# Altium PCB ExtendBoard.PcbDoc
Units mil, origin at the board's own origin, x right, y up, seen from the top; angles counter-clockwise.
Board outline 1157 x 1033 mil, 2 copper layers (Top1, Bottom4), stack 42.17 mil thick; 6 components, 10 nets, 32 pads, 2 vias.
Unrouted connection lines stored in the file: 56.
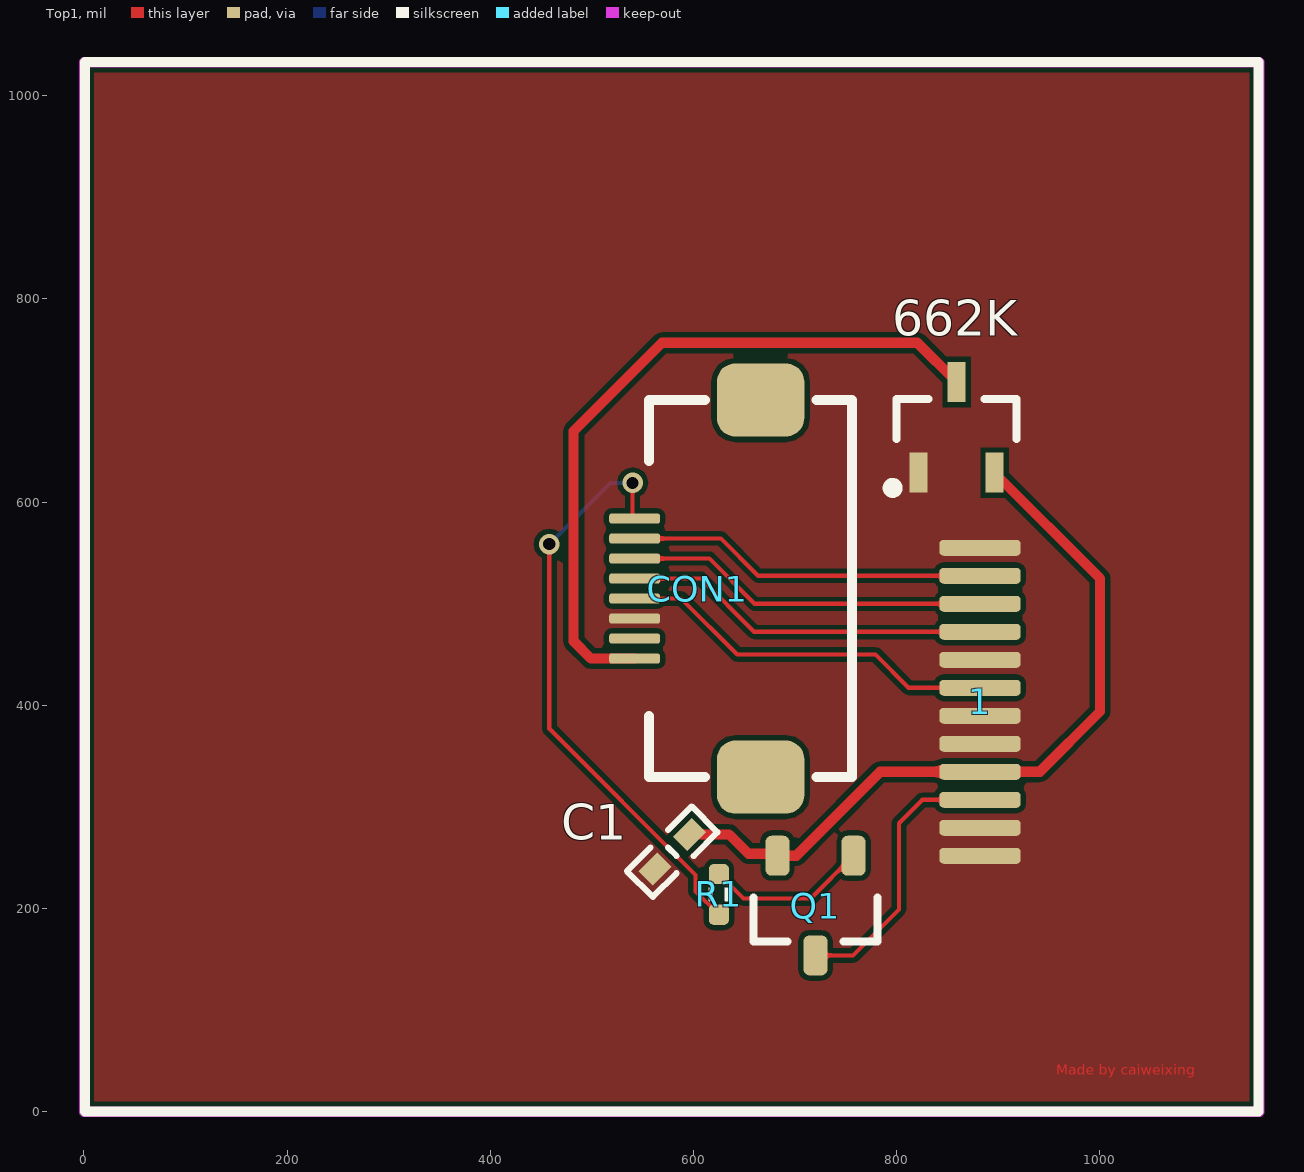
[diagram p0: Top1 view]
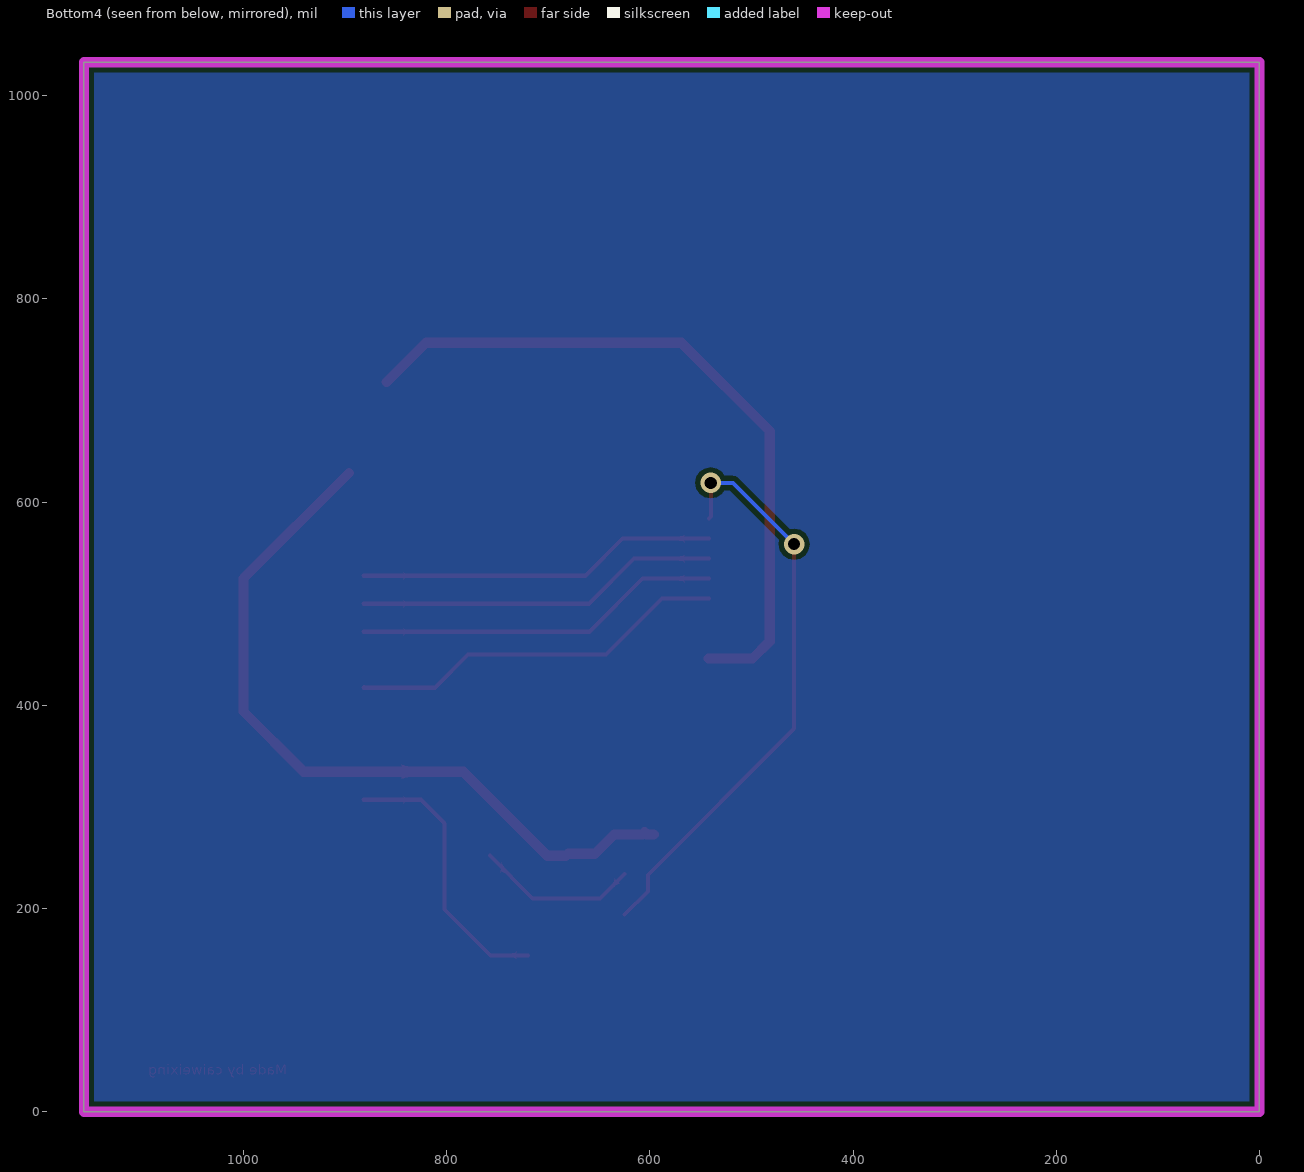
[diagram p1: Bottom4 view, seen from below]
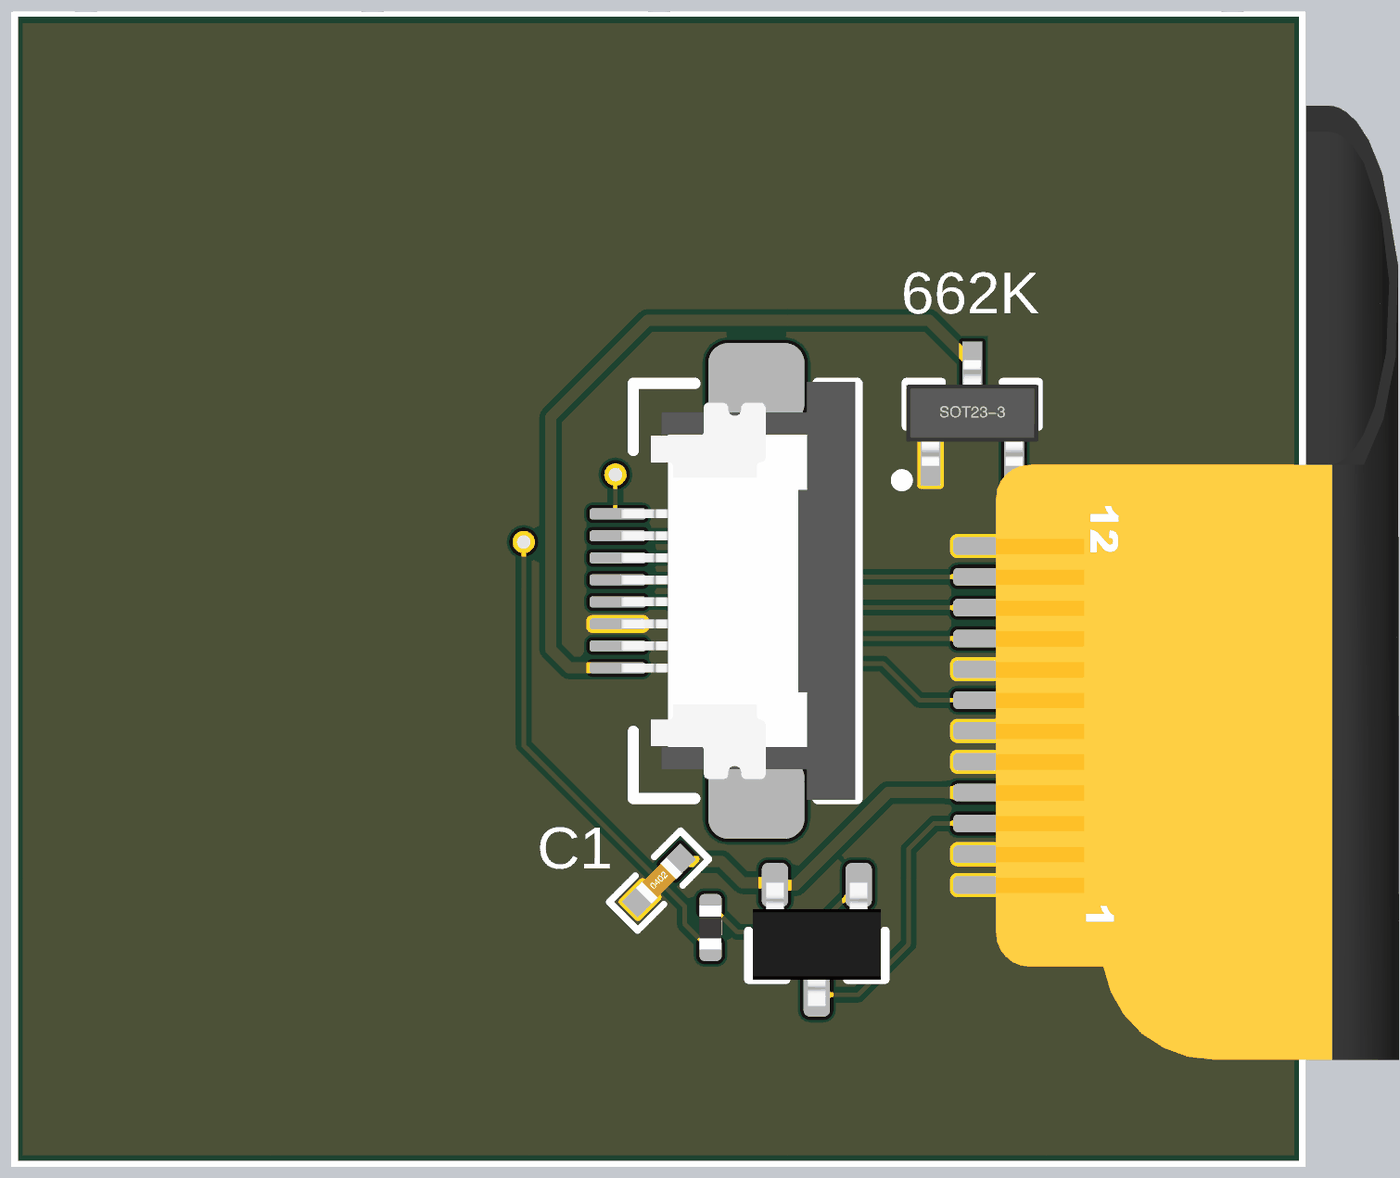
[diagram p2: 3D render of the assembled board from above, using the file's embedded part models]

## Layer stack, top to bottom
Top Solder: solder mask 0.4, Solder Resist, Dk 3.5
Top1: signal copper 1.4
Dielectric 2: core 39.37, PP-006, Dk 4.2
Bottom4: signal copper 1.4
Bottom Solder: solder mask 0.4, Solder Resist, Dk 3.5

## Board outline
0,0 1157,0 1157,1033 0,1033

## Design rules (kind name [scope] priority, off if disabled: settings)
Clearance [All] p1: gap=5 ignorepadtopadclearanceinfootprint=FALSE
ComponentClearance [All] p1: gap=0 collisioncheckmode=3 verticalgap=0 showdistances=FALSE
DiffPairsRouting [All] p1: maxlimit=9 minlimit=9 mostfreqgap=9 toplayer_minwidth=4 toplayer_maxwidth=4 toplayer_prefwidth=4 bottomlayer_minwidth=4 bottomlayer_maxwidth=4 bottomlayer_prefwidth=4 maxuncoupledlength=500
FanoutControl Fanout_BGA [All] p1: bgadir=Out bgaviamode=Centered fanoutstyle=Auto fanoutdirection=Alternating viagrid=1 // Fanout_BGA (Default Rule)
HoleSize [All] p1: absolutevalues=TRUE maxlimit=10000 minlimit=8 maxpercent=80.000 minpercent=20.000
MinimumSolderMaskSliver [All] p1 off: minsoldermaskwidth=2
PlaneClearance [All] p1: clearance=8
PlaneConnect [All] p1: planeconnectstyle=Direct reliefexpansion=20 reliefentries=4 reliefconductorwidth=10 reliefairgap=10
PolygonConnect [All] p1: connectstyle=Direct reliefconductorwidth=10 reliefentries=4 polygonreliefangle="90 Angle" airgapwidth=10
RoutingVias [All] p1: holewidth=8 width=16 viastyle="Through Hole" minholewidth=6 minwidth=12 maxholewidth=28 maxwidth=50
SilkToBoardRegionClearance [All] p1 off:
SilkToSilkClearance [All] p1: silktosilkclearance=0
SilkToSolderMaskClearance [IsPad] p1: minsilkscreentomaskgap=0 clearancetoexposedcopper=TRUE
SolderMaskExpansion [All] p1: expansion=3 istentingtop=FALSE
Width [All] p1: maxlimit=10000 minlimit=4 preferedwidth=4
20 further rules are at their usual default settings.

## Components (designator, comment, footprint, x,y, rotation, side; value= is the part's Value field where it differs from the comment)
1 "LCD-240x240" LCD-240X240-NOHOLE 675,534 r270 bottom locked
662K "XC6206P332MR" SOT23-3L 859,674 r0 top (schematic designator V1)
C1 "104" "C 0402_M" 579,256 r45 top
CON1 "FFC_0.5_8" FFC_0.5_8 631,515 r90 top
Q1 "AO3415A" SOT23-3 720,203 r270 top
R1 "1K" RES_0402 625,214 r90 top value=22R

## Footprints (in the part's own frame and the unit in brackets; to place one, negate y for a bottom-side part, rotate by r counter-clockwise, add the part's x,y. Pads: shape width x height; smd on the part's side, far side on the other; paste and mask are expansions set on the pad)
"C 0402_M" [mil] "无极性贴片电容"
  rect 26x20 smd: 1(-24,0) 2(24,0)
  silkscreen extent -45,-18 45,18, body extent -20,-10 20,10, height 21
FFC_0.5_8 [mil]
  rrect50% 72x86 smd: 0(-185.63,-35) 0(185.63,-35)
  rrect50% 10x50 smd: 1(-68.9,89) 2(-49.21,89) 3(-29.53,89) 4(-9.84,89) 5(9.84,89) 6(29.53,89) 7(49.21,89) 8(68.9,89)
  silkscreen extent -186,-125 186,75, body extent -187,-124 187,87, height 82
LCD-240X240-NOHOLE [mil]
  rrect50% 15.75x80 smd far side: 1(282,-207) 2(254.44,-207) 3(226.88,-207) 4(199.32,-207) 5(171.76,-207) 6(144.2,-207) 7(116.65,-207) 8(89.09,-207) 9(61.53,-207) 10(33.97,-207) 11(6.41,-207) 12(-21.15,-207)
  body extent -499,-565 534,673, height 20
RES_0402 [mil]
  rrect50% 20x20 smd: 1(-20,0) 2(20,0)
  silkscreen extent -7,-10 7,10, body extent -20,-10 20,10, height 14
SOT23-3 [mm] "SOT23, 3-Leads, Body 3.1x3.0mm (max), Pitch 0.95mm, IPC Medium Density"
  rrect50% 1x0.6 smd: 1(-1.246,0.95) 2(-1.246,-0.95) 3(1.246,0)
  silkscreen extent -0.2,-1.55 0.9,1.55, body extent -1.3,-1.45 1.5,1.45, height 1.2
SOT23-3L [mm] "3x1.3x1mm(长宽高)"
  rect 0.45x1 smd: 1(-0.95,-1.143) 2(0.95,-1.143) 3(0,1.125)
  silkscreen extent -1.72,-1.65 1.5,0.7, body extent -1.5,-1.2 1.5,1.2, height 1.05

## Part data
1: "显示屏"
662K: "低压差线性稳压芯片", BOM名称=低压差线性稳压芯片
C1: library part C, "无极性贴片电容", BOM名称=无极性贴片电容, 材质=X7R
CON1: "FFC", System=Connector
Q1: "MOSFET", LatestRevisionDate=17-Jul-2002, LatestRevisionNote="Re-released for DXP Platform.", PackageDescription="TO, Flat Index; 3 In-Line, Axial Leads; Body Dia. 4.6mm; Lead Dia. 0.5 mm (max)", PackageReference=E3, PackageVersion=1995/1996, Published=8-Jun-2000, Publisher="Altium Limited"
R1: library part 电阻-0402, "Resistor"

## Via types
v1: diameter 20, hole 12, Top1 to Bottom4, 2 vias

## Nets (pads, with @x,y where several pads share a name; then routed paths per layer and width w, separated by ;. In a path a pad name is that pad's centre, name@x,y a point inside that pad or via, vN(x,y) a via of type N, cw(c..) or ccw(c..) an arc to the next point about the centre after c; other vN are vias at no path point)
3V3: 1.4 662K.2 C1.2 Q1.2 | length 751
  Top1 w10: C1.2 603.04,272.97 605.16,275.09 607.28,272.97 635.03,272.97 654,254 680.65,254 Q1.2 701.06,252.06 783.68,334.68 1.4 940.68,334.68 1000,394 1000,525 662K.2@896.2,628.8
DC: 1.7 CON1.4 | length 377.3
  Top1 w4: CON1.4 587.84,505.16 643,450 779,450 811.65,417.35 1.7 1.7@881.35,418
GND: 1.1 1.2 1.5 1.6 1.8 1.12 662K.1 C1.1 CON1.3
LCD_BL: CON1.8 R1.1 | length 576.8
  Top1 w4: v1(458,558.7) 458,377 602,233 602,217 R1.1 ; v1(540,619) 540,585.9 CON1.8
  Bottom4 w4: v1(458,558.7) 518.3,619 v1(540,619)
LCD_BL_VCC: 1.3 Q1.3 | length 275.2
  Top1 w4: Q1.3 756.94,153.94 802,199 802,284 825.12,307.12 1.3
MOSI: 1.10 CON1.6 | length 358.4
  Top1 w4: CON1.6 615.47,544.53 659.97,500.03 1.10
NetQ1_1: Q1.1 R1.2 | length 159.8
  Top1 w4: R1.2 649,210 715.35,210 Q1.1
RES: 1.11 CON1.7 | length 355.2
  Top1 w4: CON1.7 626.79,564.21 663.41,527.59 1.11
SCK: 1.9 CON1.5 | length 361.7
  Top1 w4: CON1.5 607.16,524.84 659.53,472.47 1.9
VDD_5V: 662K.3 CON1.1 | length 703.1
  Top1 w10: CON1.1 498.9,446.1 482,463 482,670 569,757 820.29,757 662K.3
pads on no net: CON1.0 CON1.2

## Polygon pours and split planes (outlines as drawn)
GND on Bottom4 "NONET_L02_P-001" (solid, pour order 1): 0,1033 0,0 1157,0 1157,1033
GND on Top1 "NONET_L02_P-001" (solid, pour order 0): 0,1033 0,0 1157,0 1157,1033

## Keep-outs
Keep-Out Layer:
  the board outline again, w10

## Other copper
Top1:
  text "Made by caiweixing" at 957,36.33 h10